# Altium PCB PCB_2020-04-05 13_27_25 MIN.pcbdoc
Units mil, origin at the board's own origin, x right, y up, seen from the top; angles counter-clockwise.
Board outline 12860 x 7442.6 mil, 2 copper layers (Top Layer, Bottom Layer); 150 components, 113 nets, 598 pads, 154 vias.
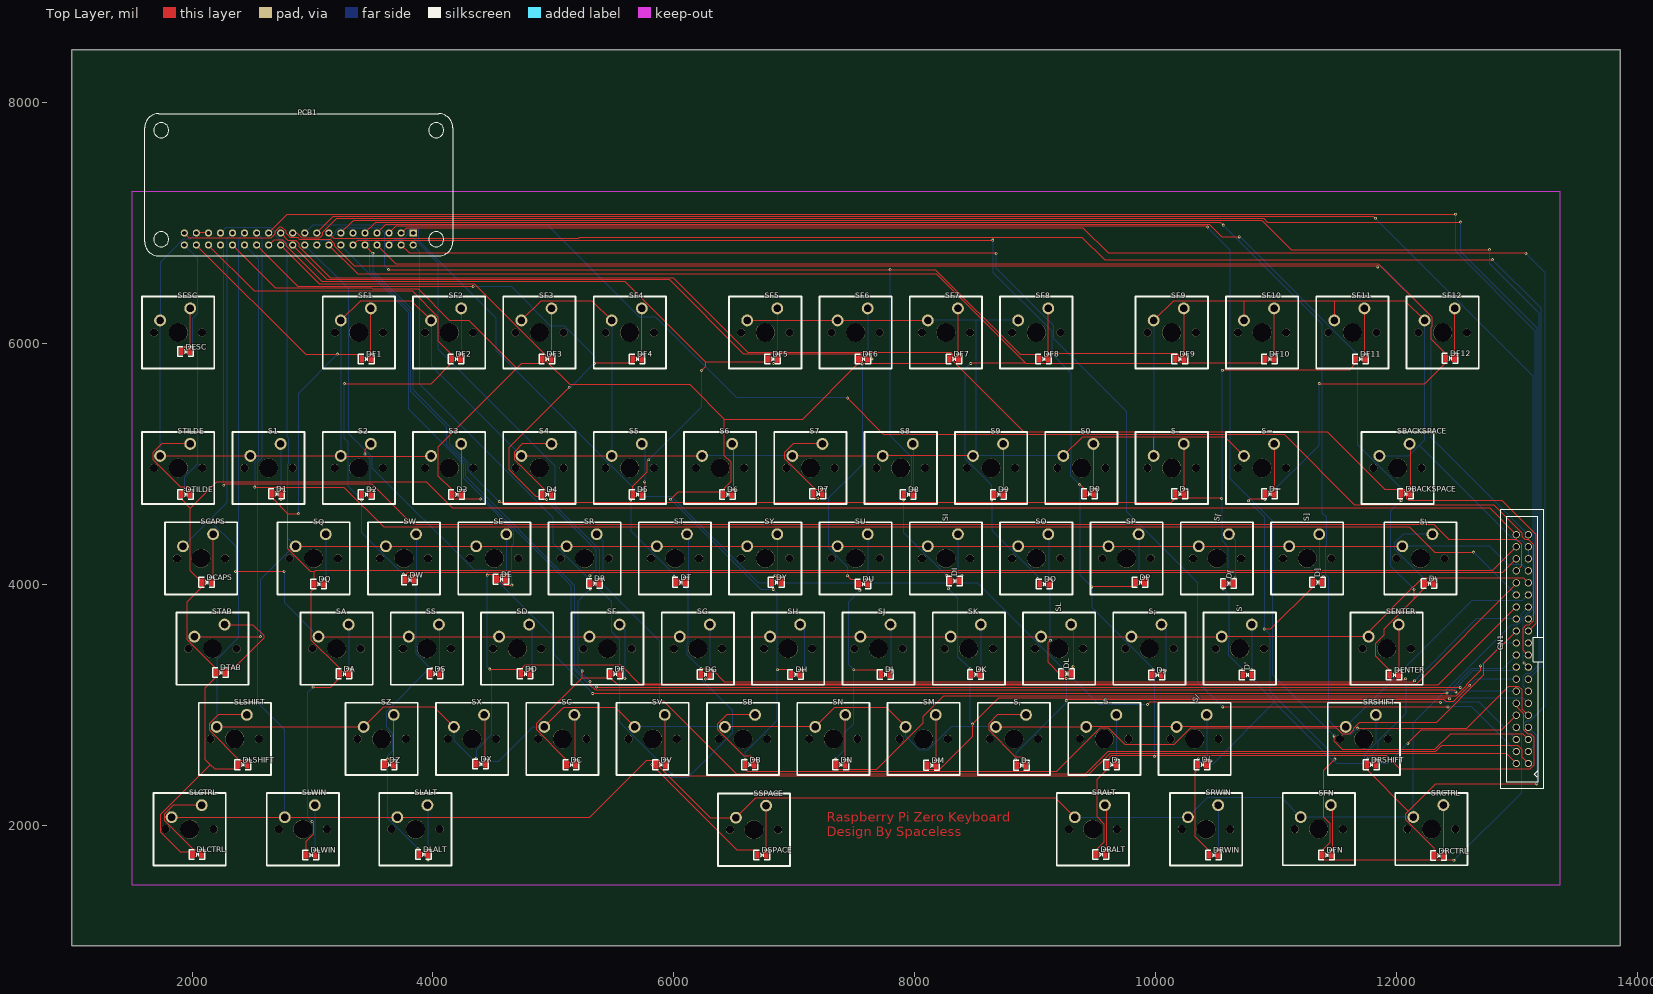
[diagram p0: Top Layer view]
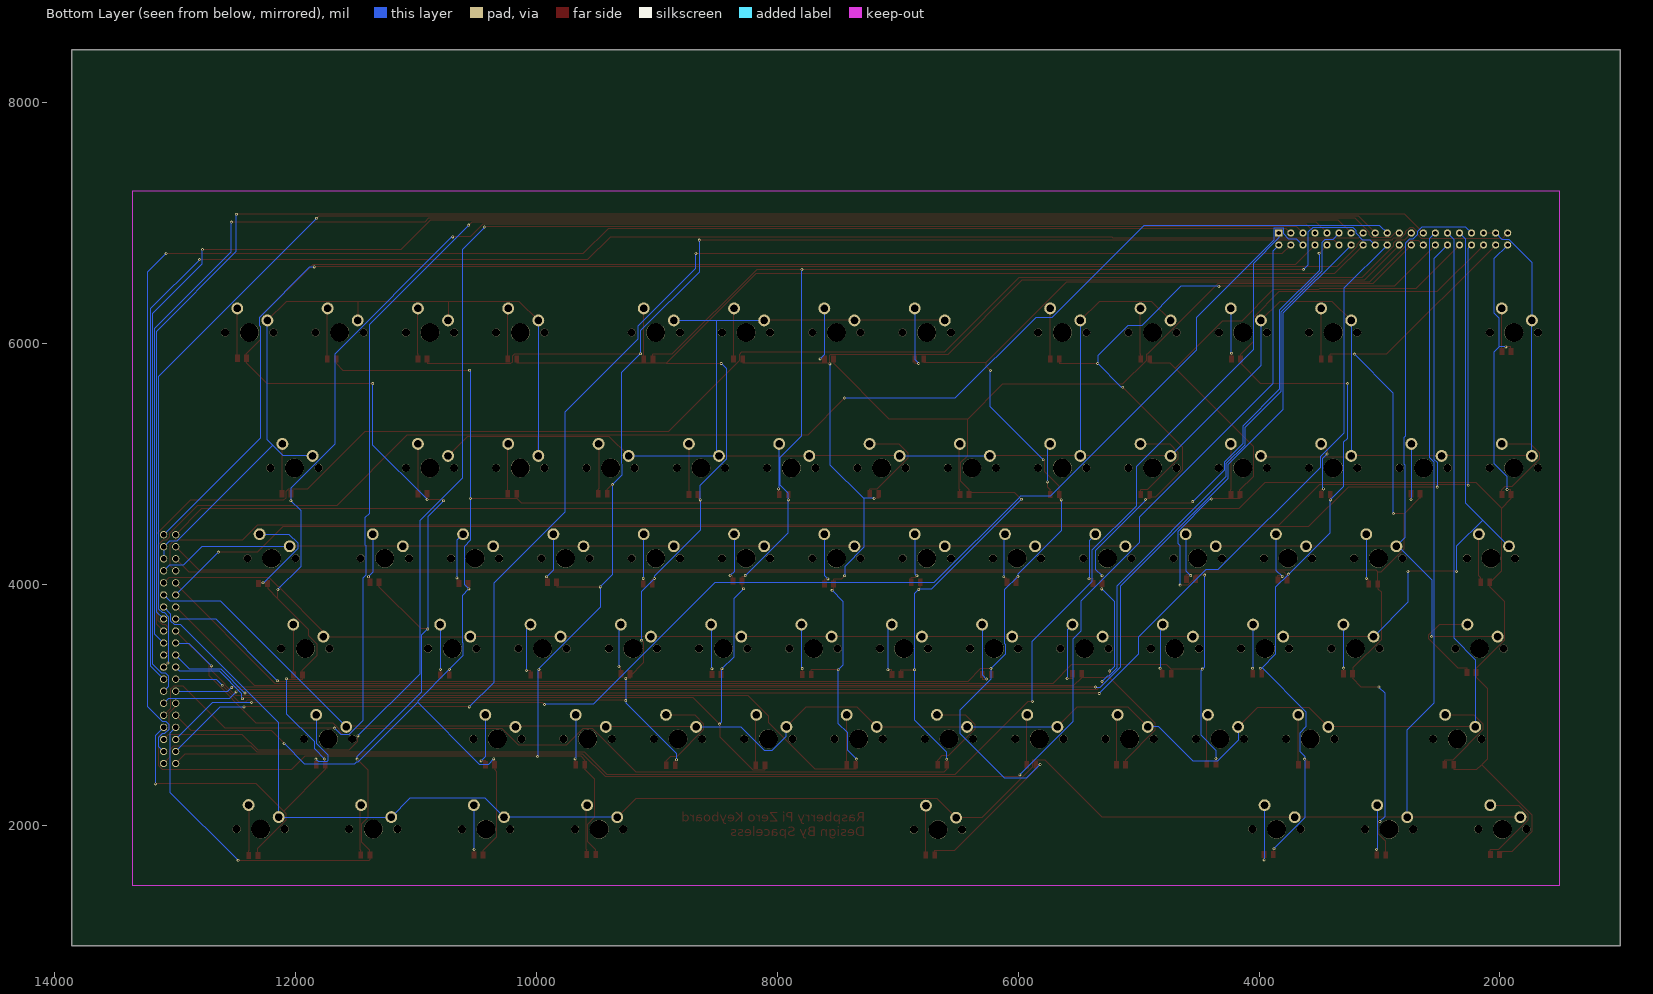
[diagram p1: Bottom Layer view, seen from below]

## Layer stack, top to bottom
Top Layer: signal copper (thickness not stored)
Dielectric: dielectric 12.6, FR-4, Dk 4.8
Bottom Layer: signal copper (thickness not stored)

## Board outline
13860,1000 1000,1000 1000,8442.6 13860,8442.6

## Components (designator, comment, footprint, x,y, rotation, side; value= is the part's Value field where it differs from the comment)
CN1 "RASPBERRYPI" HDR-IDC-2.54-2X20P 13045.9,3465.1 r90 top
D0 "1N4148" 0805D 9450.9,4755.1 r0 top
D1 "1N4148" 0805D 2700.9,4755.1 r0 top
D2 "1N4148" 0805D 3445.9,4750.1 r0 top
D3 "1N4148" 0805D 4195.9,4750.1 r0 top
D4 "1N4148" 0805D 4945.9,4750.1 r0 top
D5 "1N4148" 0805D 5695.9,4750.1 r0 top
D6 "1N4148" 0805D 6445.9,4750.1 r0 top
D7 "1N4148" 0805D 7195.9,4755.1 r0 top
D8 "1N4148" 0805D 7945.9,4750.1 r0 top
D9 "1N4148" 0805D 8695.9,4750.1 r0 top
D' "1N4148" 0805D 10760.9,3250.1 r0 top
D, "1N4148" 0805D 8885.9,2500.1 r0 top
D- "1N4148" 0805D 10200.9,4755.1 r0 top
D. "1N4148" 0805D 9635.9,2505.1 r0 top
D/ "1N4148" 0805D 10385.9,2505.1 r0 top
D; "1N4148" 0805D 10010.9,3250.1 r0 top
D= "1N4148" 0805D 10945.9,4755.1 r0 top
D[ "1N4148" 0805D 10605.9,4010.1 r0 top
D\ "1N4148" 0805D 12270.9,4010.1 r0 top
D] "1N4148" 0805D 11345.9,4020.1 r0 top
DA "1N4148" 0805D 3260.9,3260.1 r0 top
DB "1N4148" 0805D 6630.9,2505.1 r0 top
DBACKSPACE "1N4148" 0805D 12075.9,4755.1 r0 top
DC "1N4148" 0805D 5145.9,2505.1 r0 top
DCAPS "1N4148" 0805D 2120.9,4020.1 r0 top
DD "1N4148" 0805D 4765.9,3260.1 r0 top
DE "1N4148" 0805D 4565.9,4045.1 r0 top
DENTER "1N4148" 0805D 11980.9,3250.1 r0 top
DESC "1N4148" 0805D 1945.9,5935.1 r0 top
DF "1N4148" 0805D 5510.9,3260.1 r0 top
DF1 "1N4148" 0805D 3445.9,5875.1 r0 top
DF2 "1N4148" 0805D 4190.9,5875.1 r0 top
DF3 "1N4148" 0805D 4945.9,5875.1 r0 top
DF4 "1N4148" 0805D 5695.9,5875.1 r0 top
DF5 "1N4148" 0805D 6820.9,5875.1 r0 top
DF6 "1N4148" 0805D 7570.9,5875.1 r0 top
DF7 "1N4148" 0805D 8325.9,5875.1 r0 top
DF8 "1N4148" 0805D 9070.9,5875.1 r0 top
DF9 "1N4148" 0805D 10200.9,5875.1 r0 top
DF10 "1N4148" 0805D 10945.9,5875.1 r0 top
DF11 "1N4148" 0805D 11700.9,5875.1 r0 top
DF12 "1N4148" 0805D 12445.9,5880.1 r0 top
DFN "1N4148" 0805D 11420.9,1755.1 r0 top
DG "1N4148" 0805D 6260.9,3255.1 r0 top
DH "1N4148" 0805D 7010.9,3255.1 r0 top
DI "1N4148" 0805D 8330.9,4030.1 r0 top
DJ "1N4148" 0805D 7755.9,3255.1 r0 top
DK "1N4148" 0805D 8505.9,3255.1 r0 top
DL "1N4148" 0805D 9260.9,3260.1 r0 top
DLALT "1N4148" 0805D 3920.9,1760.1 r0 top
DLCTRL "1N4148" 0805D 2040.9,1760.1 r0 top
DLSHIFT "1N4148" 0805D 2420.9,2505.1 r0 top
DLWIN "1N4148" 0805D 2985.9,1755.1 r0 top
DM "1N4148" 0805D 8140.9,2500.1 r0 top
DN "1N4148" 0805D 7385.9,2505.1 r0 top
DO "1N4148" 0805D 9075.9,4005.1 r0 top
DP "1N4148" 0805D 9870.9,4020.1 r0 top
DQ "1N4148" 0805D 3050.9,4005.1 r0 top
DR "1N4148" 0805D 5340.9,4010.1 r0 top
DRALT "1N4148" 0805D 9545.9,1760.1 r0 top
DRCTRL "1N4148" 0805D 12350.9,1750.1 r0 top
DRSHIFT "1N4148" 0805D 11790.9,2505.1 r0 top
DRWIN "1N4148" 0805D 10480.9,1755.1 r0 top
DS "1N4148" 0805D 4015.9,3260.1 r0 top
DSPACE "1N4148" 0805D 6730.9,1755.1 r0 top
DT "1N4148" 0805D 6055.9,4020.1 r0 top
DTAB "1N4148" 0805D 2235.9,3270.1 r0 top
DTILDE "1N4148" 0805D 1945.9,4750.1 r0 top
DU "1N4148" 0805D 7570.9,4005.1 r0 top
DV "1N4148" 0805D 5890.9,2505.1 r0 top
DW "1N4148" 0805D 3805.9,4040.1 r0 top
DX "1N4148" 0805D 4395.9,2510.1 r0 top
DY "1N4148" 0805D 6850.9,4020.1 r0 top
DZ "1N4148" 0805D 3635.9,2505.1 r0 top
PCB1 "树莓派 zero w BCM编码引脚" "RASPBERRY PI ZERO (FACE UP) OUTLINE" 1605.9,6730.1 r0 top
S0 "MX1A" MX1A 6290.9,9375.1 r0 top
S1 "MX1A" MX1A -459.1,9375.1 r0 top
S2 "MX1A" MX1A 290.9,9375.1 r0 top
S3 "MX1A" MX1A 1040.9,9375.1 r0 top
S4 "MX1A" MX1A 1790.9,9375.1 r0 top
S5 "MX1A" MX1A 2540.9,9375.1 r0 top
S6 "MX1A" MX1A 3290.9,9375.1 r0 top
S7 "MX1A" MX1A 4040.9,9375.1 r0 top
S8 "MX1A" MX1A 4790.9,9375.1 r0 top
S9 "MX1A" MX1A 5540.9,9375.1 r0 top
S' "MX1A" MX1A 7605.9,7875.1 r0 top
S, "MX1A" MX1A 5730.9,7125.1 r0 top
S- "MX1A" MX1A 7040.9,9375.1 r0 top
S. "MX1A" MX1A 6480.9,7125.1 r0 top
S/ "MX1A" MX1A 7230.9,7125.1 r0 top
S; "MX1A" MX1A 6855.9,7875.1 r0 top
S= "MX1A" MX1A 7790.9,9375.1 r0 top
S[ "MX1A" MX1A 7415.9,8625.1 r0 top
S\ "MX1A" MX1A 9105.9,8625.1 r0 top
S] "MX1A" MX1A 8165.9,8625.1 r0 top
SA "MX1A" MX1A 105.9,7875.1 r0 top
SB "MX1A" MX1A 3480.9,7125.1 r0 top
SBACKSPACE "MX1A" MX1A 8915.9,9375.1 r0 top
SC "MX1A" MX1A 1980.9,7125.1 r0 top
SCAPS "MX1A" MX1A -1019.1,8625.1 r0 top
SD "MX1A" MX1A 1605.9,7875.1 r0 top
SE "MX1A" MX1A 1415.9,8625.1 r0 top
SENTER "MX1A" MX1A 8825.9,7875.1 r0 top
SESC "MX1A" MX1A -1209.1,10500.1 r0 top
SF "MX1A" MX1A 2355.9,7875.1 r0 top
SF1 "MX1A" MX1A 290.9,10500.1 r0 top
SF2 "MX1A" MX1A 1040.9,10500.1 r0 top
SF3 "MX1A" MX1A 1790.9,10500.1 r0 top
SF4 "MX1A" MX1A 2540.9,10500.1 r0 top
SF5 "MX1A" MX1A 3665.9,10500.1 r0 top
SF6 "MX1A" MX1A 4415.9,10500.1 r0 top
SF7 "MX1A" MX1A 5165.9,10500.1 r0 top
SF8 "MX1A" MX1A 5915.9,10500.1 r0 top
SF9 "MX1A" MX1A 7040.9,10500.1 r0 top
SF10 "MX1A" MX1A 7790.9,10500.1 r0 top
SF11 "MX1A" MX1A 8540.9,10500.1 r0 top
SF12 "MX1A" MX1A 9290.9,10500.1 r0 top
SFN "MX1A" MX1A_NO3D 11355.9,1970.1 r0 top
SG "MX1A" MX1A 3105.9,7875.1 r0 top
SH "MX1A" MX1A 3855.9,7875.1 r0 top
SI "MX1A" MX1A 5165.9,8625.1 r0 top
SJ "MX1A" MX1A 4605.9,7875.1 r0 top
SK "MX1A" MX1A 5355.9,7875.1 r0 top
SL "MX1A" MX1A 6105.9,7875.1 r0 top
SLALT "MX1A" MX1A 760.9,6375.1 r0 top
SLCTRL "MX1A" MX1A -1114.1,6375.1 r0 top
SLSHIFT "MX1A" MX1A -739.1,7125.1 r0 top
SLWIN "MX1A" MX1A -174.1,6375.1 r0 top
SM "MX1A" MX1A 4980.9,7125.1 r0 top
SN "MX1A" MX1A 4230.9,7125.1 r0 top
SO "MX1A" MX1A 5915.9,8625.1 r0 top
SP "MX1A" MX1A 6665.9,8625.1 r0 top
SQ "MX1A" MX1A -84.1,8625.1 r0 top
SR "MX1A" MX1A 2165.9,8625.1 r0 top
SRALT "MX1A" MX1A 6385.9,6375.1 r0 top
SRCTRL "MX1A" MX1A_NO3D 12290.9,1970.1 r0 top
SRSHIFT "MX1A" MX1A 8635.9,7125.1 r0 top
SRWIN "MX1A" MX1A 7325.9,6375.1 r0 top
SS "MX1A" MX1A 855.9,7875.1 r0 top
SSPACE "MX1A" MX1A_NO3D 6665.9,1965.1 r0 top
ST "MX1A" MX1A 2915.9,8625.1 r0 top
STAB "MX1A" MX1A -924.1,7875.1 r0 top
STILDE "MX1A" MX1A -1209.1,9375.1 r0 top
SU "MX1A" MX1A 4415.9,8625.1 r0 top
SV "MX1A" MX1A 2730.9,7125.1 r0 top
SW "MX1A" MX1A 665.9,8625.1 r0 top
SX "MX1A" MX1A 1230.9,7125.1 r0 top
SY "MX1A" MX1A 3665.9,8625.1 r0 top
SZ "MX1A" MX1A 480.9,7125.1 r0 top

## Footprints (in the part's own frame and the unit in brackets; to place one, negate y for a bottom-side part, rotate by r counter-clockwise, add the part's x,y. Pads: shape width x height; smd on the part's side, far side on the other; paste and mask are expansions set on the pad)
0805D [mil]
  round 0 smd: 1(-37.5,0) 2(37.5,0)
  Top Layer region: -55,27.5 -20,27.5 -20,-27.5 -55,-27.5
  Top Layer region: 20,27.5 55,27.5 55,-27.5 20,-27.5
  silkscreen extent -65,-40 65,40
HDR-IDC-2.54-2X20P [mil]
  round 60 hole 43.3: 1(-950,-50) 2(-950,50) 3(-850,-50) 4(-850,50) 5(-750,-50) 6(-750,50) 7(-650,-50) 8(-650,50) 9(-550,-50) 10(-550,50) 11(-450,-50) 12(-450,50) 13(-350,-50) 14(-350,50) 15(-250,-50) 16(-250,50) 17(-150,-50) 18(-150,50) 19(-50,-50) 20(-50,50) 21(50,-50) 22(50,50) 23(150,-50) 24(150,50) 25(250,-50) 26(250,50) 27(350,-50) 28(350,50) 29(450,-50) 30(450,50) 31(550,-50) 32(550,50) 33(650,-50) 34(650,50) 35(750,-50) 36(750,50) 37(850,-50) 38(850,50) 39(950,-50) 40(950,50)
  silkscreen extent -1161,-177 1160,178
MX1A [mil]
  round 98.4 hole 59.1 slot 59.3 at 0 deg: 1(2943.79,-4306.29) 2(3193.79,-4206.29)
  round 66.9 hole 66.9 unplated: ""(2893.79,-4406.29) ""(3293.79,-4406.29)
  round 156.7 hole 156.7 unplated: ""(3093.79,-4406.29)
  silkscreen extent 2794,-4706 3394,-4106
MX1A_NO3D [mil]
  round 98.4 hole 59.1 slot 59.3 at 0 deg: 1(-150,100) 2(100,200)
  round 66.9 hole 66.9 unplated: ""(-200,0) ""(200,0)
  round 156.7 hole 156.7 unplated: ""(0,0)
  silkscreen extent -300,-300 300,300
"RASPBERRY PI ZERO (FACE UP) OUTLINE" [mil]
  rect 60x60 hole 36: 1(2230,190)
  round 60 hole 36: 2(2230,90) 3(2130,190) 4(2130,90) 5(2030,190) 6(2030,90) 7(1930,190) 8(1930,90) 9(1830,190) 10(1830,90) 11(1730,190) 12(1730,90) 13(1630,190) 14(1630,90) 15(1530,190) 16(1530,90) 17(1430,190) 18(1430,90) 19(1330,190) 20(1330,90) 21(1230,190) 22(1230,90) 23(1130,190) 24(1130,90) 25(1030,190) 26(1030,90) 27(930,190) 28(930,90) 29(830,190) 30(830,90) 31(730,190) 32(730,90) 33(630,190) 34(630,90) 35(530,190) 36(530,90) 37(430,190) 38(430,90) 39(330,190) 40(330,90)
  silkscreen extent 0,0 2559,1181

## Via types
v1: diameter 24, hole 12, Top Layer to Bottom Layer, 154 vias

## Nets (pads, with @x,y where several pads share a name; then routed paths per layer and width w, separated by ;. In a path a pad name is that pad's centre, name@x,y a point inside that pad or via, vN(x,y) a via of type N, cw(c..) or ccw(c..) an arc to the next point about the centre after c; other vN are vias at no path point)
COL1: CN1.40 DCAPS.1 DESC.1 DLCTRL.1 DLSHIFT.1 DTAB.1 DTILDE.1 PCB1.40 | length 17531.4
  Top Layer w10: DESC.1 1908.4,5973.7 v1(1950.5,5973.7) ; v1(1940,4790) 1938.7,4788.7 1908.4,4788.7 DTILDE.1 1908.4,4711.5 1985,4634.9 ; DLCTRL.1 1980.9,1782.6 1901.3,1782.6 1735.1,1948.8 1735.1,2088.3 2151.9,2505.1 ; DCAPS.1 2083.4,4017.9 ; DLSHIFT.1 2383.4,2466.5 2190.5,2466.5 2151.9,2505.1 ; CN1.40 12778.6,4632.4 4164.9,4632.4 3947.8,4849.5 2199.6,4849.5 1985,4634.9 ; 1985,4634.9 1985,4116.3 2083.4,4017.9 ; 2083.4,4017.9 2083.4,4000.8 2083.4,3981.5 1959.1,3857.2 1959.1,3544.1 2194.5,3308.7 2198.4,3308.7 DTAB.1 2198.4,3250.8 2198.4,3231.5 2106,3139.1 2106,2551 2151.9,2505.1
  Bottom Layer w10: PCB1.40 2045.7,6710.3 2045.7,6253 2006.5,6213.8 2006.5,5973.7 ; v1(1940,4790) 1940,4897.6 2046.9,5004.5 2046.9,5933.3 2006.5,5973.7 ; v1(1950.5,5973.7) 2006.5,5973.7
COL2: CN1.38 D1.1 DA.1 DF1.1 DLWIN.1 DQ.1 PCB1.38 | length 16920.7
  Top Layer w10: PCB1.38 2942.3,5913.7 v1(3207,5913.7) 3408.4,5913.7 DF1.1 ; D1.1 2663.4,4716.5 2668.4,4716.5 2794.8,4590.1 ; v1(2884.7,4590.1) 2794.8,4590.1 ; DLWIN.1 2948.4,1867.7 3010.5,1929.8 3010.5,2019.1 v1(2996.3,2033.4) ; v1(3004.6,3150.1) 3152,3150.1 3223.4,3221.5 DA.1 3223.4,3308.1 2987,3544.5 2987,3940.1 3013.4,3966.5 DQ.1 3013.4,4024.4 3013.4,4043.7 3013.4,4106.8 ; CN1.38 12799.4,4118.6 3025.2,4118.6 3013.4,4106.8 ; 2794.8,4590.1 2794.8,4296.7 2984.7,4106.8 3013.4,4106.8
  Bottom Layer w10: v1(2884.7,4590.1) 2884.7,5591.3 v1(3207,5913.7) ; v1(2996.3,2033.4) 2956.7,2072.9 2956.7,3102.3 v1(3004.6,3150.1)
COL3: CN1.36 D2.1 DF2.1 DLALT.1 DS.1 DW.1 DZ.1 PCB1.36 | length 17568.8
  Top Layer w10: PCB1.36 2520.8,6435.2 3832.3,6435.2 4045,6222.5 4045,6022.1 4153.4,5913.7 DF2.1 4153.4,5836.5 3987,5670.1 v1(3265,5670.1) ; v1(3408.4,4704.1) D2.1 ; DZ.1 3598.4,2543.7 3614.5,2543.7 v1(3622.4,2551.6) ; v1(3754.6,4086.9) 3760.2,4086.9 3768.4,4078.7 ; DW.1 3768.4,4078.7 ; v1(3876,1806.7) 3883.4,1799.3 DLALT.1 ; DS.1 3978.4,3298.7 3982.1,3298.7 v1(3989.8,3306.3) ; CN1.36 12883.3,4102.4 3792.2,4102.4 3768.4,4078.7
  Bottom Layer w10: v1(3265,5670.1) 3265,5215 3295,5185 3295,4817.5 v1(3408.4,4704.1) 3408.4,4433.1 v1(3754.6,4086.9) 3860.1,3981.4 3860.1,3424.3 3974.4,3310 ; v1(3876,1806.7) 3876,1810.5 3622.4,2064.1 v1(3622.4,2551.6) 3622.4,2575.5 3664.2,2617.3 3664.2,2766.3 3610.5,2820 3610.5,2946.1 3974.4,3310 ; v1(3989.8,3306.3) 3978.1,3306.3 3974.4,3310
COL4: CN1.32 D3.1 DD.1 DE.1 DF3.1 DX.1 PCB1.32 | length 16440.2
  Top Layer w10: PCB1.32 2694.3,6461.7 3493,6461.7 3503.4,6451.3 3880.4,6451.3 4138.4,6193.3 4302.2,6193.3 4698.1,5797.4 ; DX.1 v1(4358.4,2557) ; v1(4394.7,4711.5) 4158.4,4711.5 D3.1 4158.4,4788.7 4045,4902.1 4045,5144.4 4698.1,5797.4 ; v1(4451,4078.9) 4455.7,4083.7 4528.4,4083.7 4528.4,4064.4 ; v1(4471.9,3298.7) 4728.4,3298.7 ; DE.1 4528.4,4064.4 ; v1(4655.3,3996) 4591.8,3996 4528.4,4059.4 4528.4,4064.4 ; DD.1 4728.4,3298.7 ; DF3.1 4908.4,5836.5 4737.1,5836.5 4698.1,5797.4 ; CN1.32 12995.9,4006.4 12168.7,3179.2 5714.6,3179.2 5558.1,3335.7 4765.4,3335.7 4728.4,3298.7
  Bottom Layer w10: v1(4358.4,2557) 4358.4,2626 4485.4,2753 4485.4,3285.2 v1(4471.9,3298.7) 4451,3319.6 v1(4451,4078.9) ; v1(4394.7,4711.5) 4405.2,4711.5 4672.3,4444.4 4672.3,4340.8 4655.3,4323.7 v1(4655.3,3996)
COL5: CN1.28 D4.1 DC.1 DF4.1 DF.1 DR.1 PCB1.28 | length 16027.8
  Top Layer w10: PCB1.28 2878.2,6477.8 4332,6477.8 v1(4333.3,6476.5) ; D4.1 4908.4,4730.8 ; v1(4944.4,4708.3) 4941.2,4711.5 4908.4,4711.5 4908.4,4730.8 ; DC.1 5108.4,2548.1 4862.1,2794.4 4862.1,2851.1 5239.7,3228.6 ; v1(5131.9,5639.2) 4634.7,5142 4634.7,4953.3 4857.3,4730.8 4908.4,4730.8 ; v1(5239.7,3282.9) 5239.7,3228.6 ; v1(5303.9,4074) 5303.9,4049.1 5303.4,4048.7 DR.1 5303.4,3967.2 v1(5306.1,3964.5) ; v1(5341.4,5836.5) 5658.4,5836.5 DF4.1 ; DF.1 5473.4,3228.6 ; CN1.28 12343.9,3163.1 5539,3163.1 5473.4,3228.6 ; 5239.7,3228.6 5473.4,3228.6
  Bottom Layer w10: v1(4333.3,6476.5) 4649.2,6476.5 4975.4,6150.4 5092.4,6150.4 5341.4,5901.4 v1(5341.4,5836.5) 5144.1,5639.2 v1(5131.9,5639.2) ; v1(4944.4,4708.3) 4944.4,4696.5 5354.8,4286.2 5354.8,4124.9 v1(5303.9,4074) ; v1(5239.7,3282.9) 5203.5,3319.1 5203.5,3861.9 v1(5306.1,3964.5)
COL6: CN1.26 D5.1 DF5.1 DG.1 DSPACE.1 DT.1 DV.1 PCB1.26 | length 17552.9
  Top Layer w10: PCB1.26 2677,6861.2 2753.6,6861.2 2783.3,6831.5 2783.3,6814.6 3082.1,6515.8 5598,6515.8 6266.4,5847.4 ; v1(5642.4,4704.2) 5649.6,4711.5 5658.4,4711.5 5658.4,4734.8 D5.1 5658.4,4817.1 5780.8,4939.5 5780.8,5025.5 v1(5792.2,5036.9) ; v1(5817.6,2506.8) 5851.7,2506.8 DV.1 5853.4,2466.5 6526.2,1793.7 6693.4,1793.7 DSPACE.1 ; v1(6003.2,4066.7) 6011.3,4058.7 6018.4,4058.7 DT.1 ; DG.1 6223.4,3298.3 v1(6227.4,3302.3) 6313.5,3302.3 6420.6,3195.3 12144.9,3195.3 v1(12151.9,3202.3) ; v1(6230.9,5779.2) 6266.4,5814.6 6266.4,5847.4 ; DF5.1 6783.4,5847.4 6266.4,5847.4
  Bottom Layer w10: v1(5642.4,4704.2) 5642.4,4449.2 6003.2,4088.3 v1(6003.2,4066.7) 6113.9,3956 6113.9,3512.2 6108.7,3506.9 6108.7,3421.1 v1(6227.4,3302.3) 6227.4,3213.5 6485.2,2955.7 6485.2,2766.1 6115.9,2396.7 5927.7,2396.7 v1(5817.6,2506.8) ; v1(5792.2,5036.9) 6230.9,5475.7 v1(6230.9,5779.2) ; v1(12151.9,3202.3) 12664.7,3715.1 CN1.26
COL7: CN1.24 D6.1 DB.1 DF6.1 DH.1 DY.1 PCB1.24 | length 16904.6
  Top Layer w10: PCB1.24 3056.4,6499.6 4343,6499.6 4928.9,5913.7 4934.1,5913.7 4937,5910.8 4937,5860.6 5135.3,5662.3 6132.9,5662.3 6420,5375.1 ; v1(5974.3,4709.5) 6034.2,4769.4 6408.4,4769.4 ; D6.1 6408.4,4769.4 ; v1(6593.4,2550.7) DB.1 6593.4,2466.5 6614.5,2445.4 9174.8,2445.4 9537.6,2808.2 9611.8,2808.2 9749.5,2670.5 10149.9,2670.5 10287.6,2808.2 11505,2808.2 11555.1,2758.1 11609.2,2758.1 11641.4,2790.3 11641.4,2805.4 11690.8,2854.8 12331.9,2854.8 12723.3,3246.1 12723.3,3342.5 CN1.24 ; DY.1 6813.4,3974.1 v1(6826.2,3961.3) ; v1(6860,3293.7) 6973.4,3293.7 DH.1 ; DF6.1 7533.4,5836.5 7072,5375.1 6420,5375.1 ; 6408.4,4769.4 6408.4,4788.7 6476.6,4856.9 6476.6,5015.7 6420,5072.3 6420,5375.1
  Bottom Layer w10: v1(5974.3,4709.5) 6722.4,3961.3 v1(6826.2,3961.3) 6860,3927.5 v1(6860,3293.7) 6860,2875.1 6593.4,2608.5 v1(6593.4,2550.7)
COL8: CN1.22 D7.1 DF7.1 DJ.1 DN.1 DU.1 PCB1.22 | length 16260.1
  Top Layer w10: PCB1.22 3124.1,6531.9 5964.9,6531.9 6583,5913.7 7555.7,5913.7 7563.3,5906.1 v1@7563.3,5836.5 ; D7.1 7158.4,4716.5 v1(7197,4716.5) ; v1(7341.5,2550.8) 7348.4,2543.9 DN.1 7348.4,2466.5 7685.4,2466.5 8073.2,2854.3 8073.2,2907.1 8243.2,3077.1 12498.3,3077.1 12585.9,3164.7 12585.9,3174.1 12699.1,3287.3 12699.2,3287.3 v1(12699.2,3325.1) ; v1(7440.9,4073.8) 7470.9,4043.7 7533.4,4043.7 DU.1 7533.4,3966.3 v1(7545.9,3953.8) ; v1(7494.1,3293.7) 7718.4,3293.7 DJ.1 ; v1(7563.3,5833.8) v1@7563.3,5836.5 ; DF7.1 8288.4,5836.5 v1@7563.3,5836.5
  Bottom Layer w10: v1(7197,4716.5) 7282.5,4716.5 ; v1(7341.5,2550.8) 7416.6,2625.9 7416.6,2768.5 7494,2845.9 v1@7494,3293.7 ; v1(7440.9,4073.8) 7440.9,4150.7 7282.5,4309.1 7282.5,4716.5 ; v1(7494.1,3293.7) v1@7494,3293.7 ; v1(7545.9,3953.8) 7451.6,3859.6 7451.6,3336.2 v1@7494,3293.7 ; v1(7563.3,5833.8) 7563.3,4997.3 7282.5,4716.5 ; v1(12699.2,3325.1) 12889.1,3515.1 CN1.22
COL9: CN1.18 D8.1 DF8.1 DI.1 DK.1 DM.1 PCB1.18 | length 16311.5
  Top Layer w10: v1(3631.9,6616.7) v1(7796.2,6616.7) 8172.6,6616.7 8875.6,5913.7 9033.4,5913.7 DF8.1 ; v1(7908.4,4703.9) D8.1 ; DM.1 8103.4,2461.5 8205.8,2461.5 8479.6,2735.3 v1(8479.6,2842.7) 8697.9,3061 12434.1,3061 v1(12442.1,3052.9) ; v1(8266.7,4074.8) 8272.8,4068.7 8293.4,4068.7 DI.1 8293.4,3979.6 v1(8280.2,3966.3) ; v1(8460,3302.1) 8468.4,3293.7 DK.1
  Bottom Layer w10: PCB1.18 3077,6861.2 3137.7,6861.2 3194,6917.5 3194,6939.3 3219.8,6965.1 3554.3,6965.1 3594.8,6924.6 3594.8,6653.8 v1(3631.9,6616.7) ; v1(7796.2,6616.7) 7796.2,5237.5 7974.3,5059.4 7974.3,4826.2 7908.4,4760.3 v1(7908.4,4703.9) 7908.4,4433.1 v1(8266.7,4074.8) ; v1(8280.2,3966.3) 8360,3886.5 8360,3402.1 v1(8460,3302.1) 8460,2862.4 v1(8479.6,2842.7) ; v1(12442.1,3052.9) 12450.2,3061 12450.2,3100 12636.1,3285.9 12966.7,3285.9 CN1.18
COL10: CN1.16 D9.1 D,.1 DF9.1 DL.1 DO.1 PCB1.16 | length 15812.1
  Top Layer w10: PCB1.16 3375.4,6580.6 8178.4,6580.6 8922.5,5836.5 ; v1(8466.1,5836.5) 8922.5,5836.5 ; v1(8639.9,4703.3) 8648.1,4711.5 8658.4,4711.5 D9.1 ; v1(8837.6,2546.2) 8845.1,2538.7 8848.4,2538.7 8848.4,2500.1 ; v1(9021.6,4051) 9029,4043.7 9038.4,4043.7 DO.1 ; v1(9127.3,3538.3) 9110.2,3521.2 9110.2,3354 9223.4,3240.8 ; DL.1 9223.4,3240.8 ; v1(9259,3037.4) 9266.5,3044.9 12396.4,3044.9 12414.8,3026.4 12471,3026.4 v1(12609,3164.5) ; v1(9259,3221.5) 9223.4,3221.5 9223.4,3240.8 ; DF9.1 10163.4,5836.5 8922.5,5836.5
  Bottom Layer w10: v1(8466.1,5836.5) 8421,5791.3 8421,5045.5 8639.9,4826.6 v1(8639.9,4703.3) 8639.9,4451.7 9021.6,4069.9 v1(9021.6,4051) 9127.3,3945.3 v1(9127.3,3538.3) ; v1(8837.6,2546.2) 8837.6,2599.4 9259,3020.8 v1(9259,3037.4) v1(9259,3221.5) ; v1(12609,3164.5) 12659.6,3215.1 CN1.16
COL11: CN1.12 D0.1 D..1 D;.1 DF10.1 DP.1 DRALT.1 PCB1.12 | length 17684.6
  Top Layer w10: PCB1.12 3377.3,6861.5 v1(8648.3,6861.5) ; v1(9137.2,5917.6) 10182.1,5917.6 10198.4,5901.3 10198.4,5850.8 10212.7,5836.5 10908.4,5836.5 DF10.1 ; v1(9369.9,4830.1) 9377,4830.1 9413.4,4793.7 D0.1 ; v1(9470.6,3981.5) 9833.4,3981.5 DP.1 ; DRALT.1 9508.4,1798.7 9575.3,1865.6 9575.3,2012 9515.4,2072 9515.4,2383.5 9598.4,2466.5 D..1 9598.4,2543.7 9633,2578.3 v1@9990.8,2578.3 ; 9973.4,3250.1 9973.4,3289.9 v1(9980.4,3296.9) ; v1(9990.8,2572.4) v1@9990.8,2578.3 ; CN1.12 12995.9,2992.3 13054.8,2933.4 13054.8,2797.7 13090.1,2762.4 13115.7,2762.4 13141.2,2736.8 13141.2,2499.6 13108.4,2466.8 12030.9,2466.8 11919.3,2578.3 v1@9990.8,2578.3
  Bottom Layer w10: v1(8648.3,6861.5) 8648.3,6595.2 9137.2,6106.3 v1(9137.2,5917.6) 9296.6,5758.2 9296.6,5007.2 9291,5001.7 9291,4909 v1(9369.9,4830.1) 9369.9,4082.1 v1(9470.6,3981.5) 9470.6,3810.9 9980.4,3301.2 v1(9980.4,3296.9) 9990.8,3286.5 v1(9990.8,2572.4)
COL12: CN1.10 D'.1 D-.1 D/.1 D[.1 DF11.1 DRWIN.1 PCB1.10 | length 16998.1
  Top Layer w10: PCB1.10 3435.9,6817.3 v1(3501.5,6751.6) ; v1(4550.6,4689.7) 4560.6,4679.7 10126.6,4679.7 10163.4,4716.5 ; D-.1 10163.4,4716.5 ; v1(10354.7,2552.9) 10348.4,2546.7 D/.1 10348.4,2466.5 10330,2448.1 10330,1907.1 10443.4,1793.7 DRWIN.1 ; v1(10548.4,4716.5) 10163.4,4716.5 ; v1(10555.8,5780.8) 11607.7,5780.8 11663.4,5836.5 DF11.1 ; v1(10561.1,3964.2) 10568.4,3971.5 D[.1 ; D'.1 v1(10723.4,3295.9) ; v1(12096.4,2681.5) 12204.2,2789.3 12870.1,2789.3 CN1.10
  Bottom Layer w10: v1(3501.5,6751.6) 3501.5,6606.8 3830.5,6277.8 3830.5,5622.2 4137.3,5315.4 4137.3,5168.6 4288.3,5017.6 4288.3,4952 v1(4550.6,4689.7) ; v1(10354.7,2552.9) 10398.2,2509.3 10473.3,2509.3 10986.4,3022.5 ; v1(10555.8,5780.8) 10548.4,5773.3 v1(10548.4,4716.5) 10548.4,4368.2 10601.6,4315 10601.6,4004.7 v1(10561.1,3964.2) 10612.6,3912.7 10612.6,3518.7 10607,3513.1 10607,3412.3 v1(10723.4,3295.9) 10986.4,3032.9 10986.4,3022.5 ; v1(12096.4,2681.5) 11927.1,2512.1 11507.2,2512.1 11490.7,2528.6 11480.3,2528.6 10986.4,3022.5
COL13: CN1.8 D=.1 D].1 DF12.1 DFN.1 PCB1.8 | length 18305.6
  Top Layer w10: PCB1.8 3694.8,6661.2 11855.8,6661.2 12298.3,6218.6 12298.3,6144.4 12291.2,6137.3 12291.2,6035.8 12408.4,5918.7 DF12.1 12408.4,5841.5 12237,5670.1 v1(11359.4,5670.1) ; v1(10771,4696.5) 10782.6,4708.1 v1(10908.4,4708.1) D=.1 ; v1(10903,3632) 10958.9,3632 11308.4,3981.5 D].1 ; v1(11489.8,2551.7) 11395,2456.9 11395,2069.8 11450.3,2014.5 11450.3,1860.6 11383.4,1793.7 DFN.1 11383.4,1745.4 11383.4,1716.5 11388.4,1711.5 v1(12477.9,1711.5)
  Bottom Layer w10: v1(10771,4696.5) 10903,4564.5 v1(10903,3632) 10953,3582 10953,3111.5 11489.8,2574.6 v1(11489.8,2551.7) ; v1(10908.4,4708.1) 11359.4,5159.1 v1(11359.4,5670.1) ; v1(12477.9,1711.5) 13039.7,2273.3 13039.7,2771.3 CN1.8
COL14: CN1.7 D\.1 DBACKSPACE.1 DENTER.1 DRCTRL.1 DRSHIFT.1 PCB1.7 | length 15632.4
  Top Layer w10: PCB1.7 3609.3,6993.5 10445.4,6993.5 10551.1,6887.8 v1(10695.8,6887.8) ; v1(11759.1,2552.2) 11753.4,2546.5 DRSHIFT.1 11753.4,2466.5 12100.7,2119.2 ; DBACKSPACE.1 12038.4,4697.4 v1(12039,4696.8) ; v1(12076.3,3218.4) 12069.4,3211.5 11943.4,3211.5 DENTER.1 11943.4,3269.4 11943.4,3288.7 11823.6,3408.5 11823.6,3509.7 11893.4,3579.5 11893.4,3631.5 12146.9,3885 ; v1(12146.9,3960.1) 12146.9,3885 ; D\.1 12233.4,3971.5 12146.9,3885 ; DRCTRL.1 12313.4,1812.3 12078.5,2047.2 12078.5,2097 12100.7,2119.2 ; v1(13164.4,2345.8) 12327.4,2345.8 12100.7,2119.2
  Bottom Layer w10: v1(10695.8,6887.8) 10703.7,6887.8 11676.5,5915 11676.5,5165 12039,4802.6 v1(12039,4696.8) 11954.6,4612.4 11954.6,4152.4 v1(12146.9,3960.1) ; v1(11759.1,2552.2) 11846.5,2639.6 11846.5,2699.4 12076.3,2929.2 v1(12076.3,3218.4) ; CN1.7 13164.4,2746.6 v1(13164.4,2345.8)
D0_2: D0.2 S0.2 | length 415.2
  Top Layer w10: S0.2 9484.7,4797.4 9488.4,4793.7 D0.2
D1_2: D1.2 S1.2 | length 509.4
  Top Layer w10: v1(2738.4,4708) D1.2
  Bottom Layer w10: S1.2 2734.7,4711.7 v1(2738.4,4708)
D2_2: D2.2 S2.2 | length 472.7
  Top Layer w10: v1(3435.5,5085.1) 3435.5,5119.6 S2.2 ; v1(3465.2,4795.8) 3472.4,4788.7 3483.4,4788.7 D2.2
  Bottom Layer w10: v1(3435.5,5085.1) 3474.1,5046.5 3474.1,4804.8 v1(3465.2,4795.8)
D3_2: D3.2 S3.2 | length 419.2
  Top Layer w10: D3.2 4233.4,4788.7 4234.7,4790 S3.2
D4_2: D4.2 S4.2 | length 849.9
  Top Layer w10: D4.2 4983.4,4788.7 4927.8,4788.7 4674.2,5042.3 4674.2,5100.6 4742.4,5168.8 S4.2
D5_2: D5.2 S5.2 | length 437.8
  Top Layer w10: D5.2 5733.4,4788.7 5757.1,4812.4 v1(5757.1,4853.1)
  Bottom Layer w10: S5.2 5757.1,5146.4 v1(5757.1,4853.1)
D6_2: D6.2 S6.2 | length 425.9
  Top Layer w10: D6.2 6483.4,4788.7 6492.7,4798 6492.7,5160.8 S6.2
D7_2: D7.2 S7.2 | length 853.2
  Top Layer w10: D7.2 7233.4,4793.7 7172.8,4793.7 6918.6,5047.9 6918.6,5096.2 6991.2,5168.8 S7.2
D8_2: D8.2 S8.2 | length 424
  Top Layer w10: D8.2 7983.4,4788.7 v1(7990.4,4795.7)
  Bottom Layer w10: S8.2 7990.4,5163.1 v1(7990.4,4795.7)
D9_2: D9.2 S9.2 | length 419.2
  Top Layer w10: D9.2 8733.4,4788.7 8734.7,4790 S9.2
D'_2: D'.2 S'.2 | length 419.2
  Top Layer w10: D'.2 v1(10798.4,3296.4)
  Bottom Layer w10: v1(10798.4,3296.4) 10799.7,3297.7 S'.2
D,_2: D,.2 S,.2 | length 846
  Top Layer w10: 8923.4,2500.1 8923.4,2538.7 8890.5,2571.6 8836.6,2571.6 8614.1,2794.1 8614.1,2845.4 8687.5,2918.8 8924.7,2918.8
D-_2: D-.2 S-.2 | length 415.2
  Top Layer w10: S-.2 10238.4,5165.1 D-.2
D._2: D..2 S..2 | length 418.4
  Top Layer w10: D..2 9673.4,2543.7 9679.8,2550.1 v1(9679.8,2552.9)
  Bottom Layer w10: S..2 9674.7,2558.1 v1(9679.8,2552.9)
D/_2: D/.2 S/.2 | length 475.2
  Top Layer w10: D/.2 10423.4,2543.7 10452.7,2543.7 v1(10460,2536.4)
  Bottom Layer w10: S/.2 10424.7,2571.7 v1(10460,2536.4)
D;_2: D;.2 S;.2 | length 468.1
  Top Layer w10: 10048.4,3250.1 10048.4,3288.7 v1(10083.7,3288.7)
  Bottom Layer w10: 10049.7,3668.8 10083.7,3634.8 v1(10083.7,3288.7)
D=_2: D=.2 S=.2 | length 414.2
  Top Layer w10: D=.2 10983.4,4793.7 10984.7,4795 S=.2
D[_2: D[.2 S[.2 | length 442.8
  Top Layer w10: D[.2 10643.4,4048.7 10653.1,4048.7 v1(10660.9,4056.5)
  Bottom Layer w10: S[.2 10660.9,4367.6 v1(10660.9,4056.5)
D\_2: D\.2 S\.2 | length 838.3
  Top Layer w10: v1(12270.9,4016.3) 12302.2,4016.3 D\.2
  Bottom Layer w10: v1(12270.9,4016.3) 12265.2,4016.3 11984.5,4297 11984.5,4348.1 12055.2,4418.8 S\.2
D]_2: D].2 S].2 | length 421
  Top Layer w10: D].2 11383.4,4058.7 11388.1,4058.7 v1(11395.2,4065.7)
  Bottom Layer w10: S].2 11359.7,4101.3 v1(11395.2,4065.7)
DA_2: DA.2 SA.2 | length 409.2
  Top Layer w10: DA.2 v1(3298.4,3306.6)
  Bottom Layer w10: v1(3298.4,3306.6) 3299.7,3307.9 SA.2
DB_2: DB.2 SB.2 | length 841.4
  Top Layer w10: DB.2 6668.4,2543.7 6633.6,2578.5 6579.8,2578.5 6360.4,2797.8 6360.4,2840.7 6438.5,2918.8 SB.2
DBACKSPACE_2: DBACKSPACE.2 SBACKSPACE.2 | length 415.2
  Top Layer w10: SBACKSPACE.2 12113.4,5165.1 DBACKSPACE.2
DC_2: DC.2 SC.2 | length 417.3
  Top Layer w10: SC.2 5183.4,2910.1 DC.2
DCAPS_2: DCAPS.2 SCAPS.2 | length 405.5
  Top Layer w10: DCAPS.2 2158.4,4058.7 2174.7,4075 SCAPS.2
DD_2: DD.2 SD.2 | length 431.9
  Top Layer w10: DD.2 4803.4,3298.7 4814.3,3298.7 v1(4821.9,3306.3)
  Bottom Layer w10: SD.2 4821.9,3646.6 v1(4821.9,3306.3)
DE_2: DE.2 SE.2 | length 440.1
  Top Layer w10: v1(4567.2,4074.8) 4576.1,4083.7 4603.4,4083.7 DE.2
  Bottom Layer w10: v1(4567.2,4074.8) 4609.7,4117.3 SE.2
DENTER_2: DENTER.2 SENTER.2 | length 419.2
  Top Layer w10: DENTER.2 12018.4,3288.7 12019.7,3290 SENTER.2
DF_2: DF.2 SF.2 | length 549.6
  Top Layer w10: DF.2 5548.4,3221.5 v1(5593.8,3221.5)
  Bottom Layer w10: SF.2 5593.8,3624.7 v1(5593.8,3221.5)
DFN_2: DFN.2 SFN.2 | length 422.8
  Top Layer w10: SFN.2 11466.5,2159.5 11466.5,1801.7 11458.4,1793.7 DFN.2
DG_2: DG.2 SG.2 | length 538.8
  Top Layer w10: v1(6264.9,3216.5) 6298.4,3216.5 DG.2
  Bottom Layer w10: v1(6264.9,3216.5) 6299.7,3251.3 SG.2
DH_2: DH.2 SH.2 | length 461.4
  Top Layer w10: DH.2 7048.4,3293.7 v1(7082.5,3293.7)
  Bottom Layer w10: SH.2 7082.5,3636 v1(7082.5,3293.7)
DI_2: DI.2 SI.2 | length 421.3
  Top Layer w10: DI.2 8368.4,4068.7 8384.3,4068.7 v1(8392.1,4076.4)
  Bottom Layer w10: SI.2 8359.7,4108.8 v1(8392.1,4076.4)
DJ_2: DJ.2 SJ.2 | length 416.3
  Top Layer w10: DJ.2 v1(7793.4,3302.2)
  Bottom Layer w10: v1(7793.4,3302.2) 7799.7,3308.5 SJ.2
DK_2: DK.2 SK.2 | length 416.3
  Top Layer w10: DK.2 v1(8543.4,3302.1)
  Bottom Layer w10: v1(8543.4,3302.1) 8549.7,3308.4 SK.2
DL_2: DL.2 SL.2 | length 422.2
  Top Layer w10: DL.2 9298.4,3305 v1(9315.3,3321.9)
  Bottom Layer w10: SL.2 9315.3,3653.2 v1(9315.3,3321.9)
DLALT_2: DLALT.2 SLALT.2 | length 501.4
  Top Layer w10: v1(3958.4,1714.5) DLALT.2
  Bottom Layer w10: SLALT.2 3958.4,2165.1 v1(3958.4,1714.5)
DLCTRL_2: DLCTRL.2 SLCTRL.2 | length 844.1
  Top Layer w10: DLCTRL.2 2078.4,1798.7 2012.8,1798.7 1767.7,2043.8 1767.7,2094.2 1842.3,2168.8 SLCTRL.2
DLSHIFT_2: DLSHIFT.2 SLSHIFT.2 | length 853.2
  Top Layer w10: SLSHIFT.2 2215.5,2918.8 2141.6,2844.9 2141.6,2794.9 2392.8,2543.7 2458.4,2543.7 DLSHIFT.2
DLWIN_2: DLWIN.2 SLWIN.2 | length 415.2
  Top Layer w10: DLWIN.2 v1(3023.4,1801.9)
  Bottom Layer w10: SLWIN.2 3019.7,1805.6 v1(3023.4,1801.9)
DM_2: DM.2 SM.2 | length 420.2
  Top Layer w10: SM.2 8178.4,2915.1 DM.2
DN_2: DN.2 SN.2 | length 414.2
  Top Layer w10: DN.2 7423.4,2543.7 7424.7,2545 SN.2
DO_2: DO.2 SO.2 | length 415.2
  Top Layer w10: DO.2 v1(9113.4,4052.1)
  Bottom Layer w10: SO.2 9113.4,4415.1 v1(9113.4,4052.1)
DP_2: DP.2 SP.2 | length 424.7
  Top Layer w10: DP.2 9908.4,4058.7 v1(9915.4,4065.7)
  Bottom Layer w10: SP.2 9859.7,4121.4 v1(9915.4,4065.7)
DQ_2: DQ.2 SQ.2 | length 429.7
  Top Layer w10: DQ.2 3088.4,4043.7 3100.7,4043.7 v1(3108.6,4051.6)
  Bottom Layer w10: v1(3108.6,4051.6) 3109.7,4052.7 SQ.2
DR_2: DR.2 SR.2 | length 464
  Top Layer w10: DR.2 5378.4,4048.7 v1(5412,4048.7)
  Bottom Layer w10: SR.2 5412,4366.5 v1(5412,4048.7)
DRALT_2: DRALT.2 SRALT.2 | length 417
  Top Layer w10: SRALT.2 9591.5,2157 9591.5,1806.7 9583.4,1798.7 DRALT.2
DRCTRL_2: DRCTRL.2 SRCTRL.2 | length 421
  Top Layer w10: DRCTRL.2 12388.4,1788.7 12390.9,1791.2 SRCTRL.2
DRSHIFT_2: DRSHIFT.2 SRSHIFT.2 | length 578.4
  Top Layer w10: DRSHIFT.2 11828.4,2543.7 11831.6,2546.8 v1(11831.6,2551.6)
  Bottom Layer w10: SRSHIFT.2 11829.7,2682.7 11734,2586.9 11734,2538.7 11743.6,2529.1 11809,2529.1 v1(11831.6,2551.6)
DRWIN_2: DRWIN.2 SRWIN.2 | length 414.2
  Top Layer w10: DRWIN.2 v1(10518.4,1801.2)
  Bottom Layer w10: v1(10518.4,1801.2) 10519.7,1802.5 SRWIN.2
DS_2: DS.2 SS.2 | length 410.2
  Top Layer w10: DS.2 v1(4053.4,3306.1)
  Bottom Layer w10: SS.2 4053.4,3665.1 v1(4053.4,3306.1)
DSPACE_2: DSPACE.2 SSPACE.2 | length 411
  Top Layer w10: SSPACE.2 6768.4,2162.6 DSPACE.2
DT_2: DT.2 ST.2 | length 425.1
  Top Layer w10: DT.2 6093.4,4058.7 6112.7,4058.7 v1(6119.7,4065.6)
  Bottom Layer w10: ST.2 6119.7,4408.8 v1(6119.7,4065.6)
DTAB_2: DTAB.2 STAB.2 | length 847.2
  Top Layer w10: STAB.2 2503.7,3668.8 2594,3578.5 2594,3553.7 2348.9,3308.7 2273.4,3308.7 DTAB.2
DTILDE_2: DTILDE.2 STILDE.2 | length 846.7
  Top Layer w10: DTILDE.2 1983.4,4788.7 1958.5,4813.6 1902.9,4813.6 1674.2,5042.3 1674.2,5095.2 1747.8,5168.8 STILDE.2
DU_2: DU.2 SU.2 | length 451.2
  Top Layer w10: v1(7580.4,4048.2) 7585,4043.7 7608.4,4043.7 DU.2
  Bottom Layer w10: v1(7580.4,4048.2) 7609.7,4077.5 SU.2
DV_2: DV.2 SV.2 | length 415.2
  Top Layer w10: SV.2 5928.4,2915.1 DV.2
DW_2: DW.2 SW.2 | length 449.7
  Top Layer w10: v1(3807.8,4068.9) 3817.5,4078.7 3843.4,4078.7 DW.2
  Bottom Layer w10: v1(3807.8,4068.9) 3859.7,4120.9 SW.2
DX_2: DX.2 SX.2 | length 412.3
  Top Layer w10: SX.2 4433.4,2910.1 DX.2
DY_2: DY.2 SY.2 | length 444.5
  Top Layer w10: v1(6841.4,4073.8) 6856.4,4058.7 6888.4,4058.7 DY.2
  Bottom Layer w10: v1(6841.4,4073.8) 6859.7,4092.1 SY.2
DZ_2: DZ.2 SZ.2 | length 414.2
  Top Layer w10: DZ.2 3673.4,2543.7 3674.7,2545 SZ.2
PCB1_1: CN1.1 PCB1.1 | length 12398.4
  Top Layer w10: v1(5882.2,3030.1) 5917.9,3030.1 6524.2,2423.8 9416.3,2423.8 9604.2,2611.7 12322.6,2611.7 12372.5,2661.6 13012.1,2661.6 13045.9,2627.8 13045.9,2565.1 CN1.1
  Bottom Layer w10: PCB1.1 3835.9,6879 4045,6669.9 4045,5955.1 5015.1,4985.1 5015.1,4656.4 5383.4,4288.1 5383.4,4027.8 5882.2,3529 v1(5882.2,3030.1)
PCB1_2: CN1.2 PCB1.2 | length 12416.5
  Top Layer w10: v1(5985.9,2420.6) 5998.8,2407.7 9431,2407.7 9619,2595.6 12915.4,2595.6 CN1.2
  Bottom Layer w10: PCB1.2 3886.9,6769.1 3886.9,5669.2 4994.9,4561.2 4994.9,4348.3 5479.1,3864.1 5479.1,3612.7 5545.7,3546.1 5545.7,2860.8 v1(5985.9,2420.6)
PCB1_3: CN1.3 PCB1.3 | length 13798.4
  Top Layer w10: PCB1.3 3777,6961.2 9398.8,6961.2 9609.9,6750.1 v1(13076.2,6750.1)
  Bottom Layer w10: v1(13076.2,6750.1) 13233.7,6592.6 13233.7,2991.5 13107.3,2865.1 13080.1,2865.1 13054.8,2839.8 13054.8,2796.7 13090.8,2760.7 13108.5,2760.7 13139.3,2729.8 13139.3,2658.5 CN1.3
PCB1_4: CN1.4 PCB1.4 | length 12105.4
  Top Layer w10: PCB1.4 3805.9,6750.1 v1(8676.6,6750.1) ; v1(10558.3,2984.4) v1(12428.9,2984.4)
  Bottom Layer w10: v1(8676.6,6750.1) 8676.6,6627.1 9153.3,6150.4 9153.3,6041.5 9759.9,5434.9 9759.9,4607 10351,4015.9 10351,3191.6 v1(10558.3,2984.4) ; v1(12428.9,2984.4) 12626.6,2984.4 CN1.4
PCB1_5: CN1.5 PCB1.5 | length 13243.1
  Top Layer w10: PCB1.5 3693.2,6977.4 10422.7,6977.4 v1(10430.3,6969.8) ; v1(11482.4,2744.7) 11482.4,2699.3 11553.8,2627.8 12315.9,2627.8 12446.9,2758.8 13052.2,2758.8 CN1.5
  Bottom Layer w10: v1(10430.3,6969.8) 10618.4,6781.7 10618.4,4881.8 10969.1,4531.1 10969.1,3258.1 v1(11482.4,2744.7)
PCB1_6: CN1.6 PCB1.6 | length 11434.8
  Top Layer w10: v1(9933.6,3005) 9950.4,3021.8 v1(12365.6,3021.8)
  Bottom Layer w10: PCB1.6 3685.9,6870.1 3752,6870.1 3794.8,6912.9 3794.8,6958.3 3797.7,6961.2 3875.9,6961.2 3878.8,6958.3 3878.8,6858.9 4519.9,6217.8 4519.9,5948.3 5735.7,4732.5 5983.9,4732.5 5997.4,4719 5997.4,4717.4 6700.2,4014.6 8518.6,4014.6 9528.3,3005 v1(9933.6,3005) ; v1(12365.6,3021.8) 12689.2,3021.8 CN1.6
PCB1_9: CN1.9 PCB1.9 | length 13718
  Top Layer w10: PCB1.9 3525.5,7009.6 10538.6,7009.6 v1(10562.8,6985.5) ; v1(11676.9,2808.3) 12586.3,2808.3 12934.3,3156.2 13013.5,3156.2 13040.2,3129.5 13040.2,2970.8 CN1.9
  Bottom Layer w10: v1(10562.8,6985.5) 11386.3,6162 11386.3,4592.9 11420.4,4558.8 11420.4,4326.4 11415.1,4321.2 11415.1,4080.8 11436.5,4059.4 11436.5,2875 11555.5,2756 11624.6,2756 v1(11676.9,2808.3)
PCB1_11: CN1.11 PCB1.11 | length 12466.3
  Top Layer w10: v1(5304.2,3196) 5304.2,3169.1 5347.8,3125.5 12478.5,3125.5 v1(12494.6,3109.4)
  Bottom Layer w10: PCB1.11 3385.9,6870.1 3451.7,6870.1 3477,6844.8 3477,6605.2 3814.4,6267.8 3814.4,5607.4 4115.5,5306.3 4115.5,5163.5 4272.2,5006.8 4272.2,4899 5179.1,3992.1 5179.1,3310.8 5245.2,3244.8 5255.4,3244.8 v1(5304.2,3196) ; v1(12494.6,3109.4) 12546.6,3057.4 13053.6,3057.4 CN1.11
PCB1_13: CN1.13 PCB1.13 | length 13609.4
  Top Layer w10: PCB1.13 3341.6,7025.8 10882.4,7025.8 11125.6,6782.6 v1(12773.4,6782.6)
  Bottom Layer w10: v1(12773.4,6782.6) 12773.4,6664.9 13185.3,6253 13185.3,3339.2 13111.2,3265.1 13080.1,3265.1 13054.8,3239.8 13054.8,3156.2 CN1.13
PCB1_14: CN1.14 PCB1.14 | length 12225.4
  Top Layer w10: v1(5358.4,3150) 5361.4,3147 v1(12530.4,3147)
  Bottom Layer w10: PCB1.14 3798.3,6257.7 3798.3,5457.9 4256.1,5000.1 4256.1,4883.4 5148,3991.5 5148,3319.1 5317.2,3150 v1(5358.4,3150) ; v1(12530.4,3147) 12562.3,3115.1 CN1.14
PCB1_15: CN1.15 PCB1.15 | length 13455.2
  Top Layer w10: PCB1.15 3178.4,6877.6 5210.3,6877.6 5219.1,6886.4 9388.8,6886.4 9576.7,6698.5 v1(12797.7,6698.5)
  Bottom Layer w10: v1(12797.7,6698.5) 13201.4,6294.7 13201.4,3320.6 CN1.15
PCB1_17: CN1.17 PCB1.17 | length 13187
  Top Layer w10: PCB1.17 3173.8,7058 11810,7058 v1(11825.5,7042.5) ; v1(13061.3,3349.7) CN1.17
  Bottom Layer w10: v1(11825.5,7042.5) 13137,5731 13137,3796.8 13105.3,3765.1 13087,3765.1 13053.1,3731.2 13053.1,3357.9 v1(13061.3,3349.7)
PCB1_19: CN1.19 PCB1.19 | length 12330.8
  Top Layer w10: v1(7440.9,5550.1) 7745.2,5245.7 11071.7,5245.7 11656.4,4661.1 12812.6,4661.1 13045.9,4427.7 13045.9,4399.3 13071.2,4374 13099,4374 13140.1,4332.9 13140.1,3699.8 13105.3,3665.1 13080.1,3665.1 13054.8,3639.8 13054.8,3456.2 CN1.19
  Bottom Layer w10: PCB1.19 3000.2,6984.4 4953.7,6984.4 5716.1,6221.9 5849.7,6221.9 6521.5,5550.1 v1(7440.9,5550.1)
PCB1_20: CN1.20 PCB1.20 | length 12573.4
  Top Layer w10: v1(5327.1,3096.4) 12416.9,3096.4 v1(12420.7,3100.2)
  Bottom Layer w10: PCB1.20 3295.3,6460.7 3295.3,5258 3492.8,5060.5 3492.8,4972.7 4343.3,4122.2 4443.1,4122.2 5001.7,3563.7 5001.7,3421.9 v1(5327.1,3096.4) ; v1(12420.7,3100.2) 12622.5,3302 12882.8,3302 CN1.20
PCB1_21: CN1.21 PCB1.21 | length 13598.7
  Top Layer w10: PCB1.21 2869.8,6920.1 2910.9,6879 3061.3,6879 3085.9,6903.6 3085.9,6928.2 3199.5,7041.9 10897.1,7041.9 10928.7,7010.3 v1(12533.9,7010.3)
  Bottom Layer w10: v1(12533.9,7010.3) 12533.9,6762.5 13169.2,6127.2 13169.2,3588.4 CN1.21
PCB1_23: CN1.23 PCB1.23 | length 12361.1
  Top Layer w10: PCB1.23 2794.8,6861.2 2860.6,6861.2 2885.9,6835.9 2885.9,6808.9 3146.8,6548 5994.3,6548 6612.5,5929.8 8298,5929.8 8317,5910.8 8317,5859.9 8906,5271 11427.5,5271 11904.8,4793.7 12060.5,4793.7 12083.7,4770.5 12083.7,4719.4 12104,4699.2 12876.8,4699.2 13156.2,4419.8 13156.2,3675.4 CN1.23
PCB1_25: CN1.25 PCB1.25 | length 13578.2
  Top Layer w10: PCB1.25 2791.3,7075.5 v1(12491.7,7075.5)
  Bottom Layer w10: v1(12491.7,7075.5) 12491.7,6767.5 13153.1,6106.1 13153.1,3772.3 CN1.25
PCB1_30: CN1.30 PCB1.30 | length 12913.7
  Top Layer w10: v1(2520.9,4809.9) 3260.9,4809.9 3591.7,4479.1 12107.2,4479.1 12316.7,4269.6 v1(12641.4,4269.6)
  Bottom Layer w10: PCB1.30 2548.2,6707.8 2548.2,5042.1 2520.9,5014.8 v1(2520.9,4809.9) ; v1(12641.4,4269.6) CN1.30
PCB1_34: CN1.34 PCB1.34 | length 13229.6
  Top Layer w10: v1(2263.5,4825.5) 2271.4,4833.4 3497,4833.4 3831.4,4499 12314.3,4499 12439.8,4373.5 13001.4,4373.5 13039.1,4335.8 13039.1,4158.3 CN1.34
  Bottom Layer w10: PCB1.34 2263.5,6792.5 v1(2263.5,4825.5)
PCB1_39: CN1.39 PCB1.39 | length 12904.5
  Top Layer w10: PCB1.39 1978.6,6877.4 2655.2,6877.4 2688.5,6910.6 2688.5,6931.9 2724.3,6967.7 2746.4,6967.7 2780.2,6933.9 2780.2,6917 2818.2,6879 2880.1,6879 2896.2,6862.9 3151.4,6862.9 3185.9,6828.3 3185.9,6808 3349.9,6644 11839.9,6644 v1(11845.9,6638.1)
  Bottom Layer w10: v1(11845.9,6638.1) 11881.2,6638.1 12298.3,6220.9 12298.3,6150.3 12289.5,6141.4 12289.5,5221.5 CN1.39
ROW1: CN1.35 CN1.37 PCB1.35 PCB1.37 S0.1 S1.1 S2.1 S3.1 S4.1 S5.1 S6.1 S7.1 S8.1 S9.1 S-.1 S=.1 SBACKSPACE.1 SESC.1 SF1.1 SF2.1 SF3.1 SF4.1 SF5.1 SF6.1 SF7.1 SF8.1 SF9.1 SF10.1 SF11.1 SF12.1 STILDE.1 | length 26091.3
  Top Layer w10: STILDE.1 S1.1 S2.1 3241.5,5062 3977.9,5062 S3.1 ; PCB1.37 PCB1.35 ; SF1.1 3395,6354.1 3824.4,6354.1 SF2.1 ; S4.1 S5.1 S6.1 ; SF3.1 4895,6354.1 5324.4,6354.1 SF4.1 ; SF5.1 SF6.1 SF7.1 ; S7.1 S8.1 S9.1 ; S0.1 9395.5,5229.6 9984.7,5229.6 ; S-.1 9984.7,5229.6 ; SF9.1 10145.9,6355 10734.7,6355 ; S=.1 10573.9,5229.6 9984.7,5229.6 ; SF10.1 10734.7,6355 ; SF11.1 11484.7,6355 ; SF12.1 12073.5,6355 11484.7,6355 ; 10734.7,6355 11484.7,6355
  Bottom Layer w10: STILDE.1 SESC.1 1734.7,6678.7 1926.1,6870.1 1985.9,6870.1 PCB1.37 ; S2.1 SF1.1 ; SF2.1 3984.7,5818.8 S4.1 ; S5.1 SF4.1 ; S6.1 S7.1 ; SF7.1 8505.8,6193.8 ; S9.1 S9.1@8505.8,5089.9 ; SF8.1 8505.8,6193.8 ; S0.1 8526.9,5068.8 S9.1@8505.8,5089.9 ; S-.1 SF9.1 ; SBACKSPACE.1 12102,5068.8 12189.8,5156.6 ; SF12.1 12234.7,5201.5 12189.8,5156.6 ; CN1.35 CN1.37 13045.9,4365.1 12981.2,4365.1 12189.8,5156.6 ; S9.1@8505.8,5089.9 8505.8,6193.8
ROW2: CN1.33 PCB1.33 S[.1 S\.1 S].1 SE.1 SI.1 SO.1 SP.1 SQ.1 SR.1 ST.1 STAB.1 SU.1 SW.1 SY.1 | length 14938
  Top Layer w10: STAB.1 v1(2567.4,3568.8) ; SQ.1 SW.1 SE.1 SR.1 ST.1 SY.1 SU.1 SI.1 SO.1 SP.1 S[.1 S].1 S\.1
  Bottom Layer w10: PCB1.33 2284.5,6968.7 2649.6,6968.7 2685.9,6932.4 2685.9,6905.7 2724,6867.6 2753,6867.6 2785.9,6834.7 2785.9,5233.6 2797.7,5221.8 2797.7,5005.3 2789.9,4997.5 2789.9,4388.6 SQ.1@2852,4326.5 ; v1(2567.4,3568.8) 2567.4,4041.8 SQ.1@2852,4326.5 ; SQ.1 SQ.1@2852,4326.5 ; S\.1 12773.8,4318.8 12927.5,4165.1 13045.9,4165.1 CN1.33
ROW3: CN1.31 PCB1.31 S'.1 S;.1 SA.1 SCAPS.1 SD.1 SENTER.1 SF.1 SG.1 SH.1 SJ.1 SK.1 SL.1 SS.1 | length 14645.7
  Top Layer w10: v1(2362.1,4110.1) v1(2764.8,4110.1) ; SA.1 SS.1 SD.1 SF.1 SG.1 SH.1 SJ.1 SK.1 SL.1 9799.7,3568.8 S'.1 SENTER.1 11769.7,3610 12123.8,3964.1 12123.8,3969.7 12137.3,3983.2 12142.9,3983.2 12218.3,4058.6 13052.4,4058.6 CN1.31
  Bottom Layer w10: SCAPS.1 2142.7,4536.8 ; PCB1.31 2286.6,6870.7 2286.6,4680.7 2142.7,4536.8 ; v1(2362.1,4110.1) 2362.1,4317.3 2142.7,4536.8 ; v1(2764.8,4110.1) 2764.8,3853.7 SA.1
ROW4: CN1.29 PCB1.29 S,.1 S..1 S/.1 SB.1 SC.1 SLSHIFT.1 SM.1 SN.1 SRSHIFT.1 SV.1 SX.1 SZ.1 | length 16461.4
  Top Layer w10: SLSHIFT.1 SZ.1 3587.8,2981.9 4011.6,2981.9 SX.1 ; SC.1 5086.3,2980.4 5513.1,2980.4 SV.1 ; SB.1 SN.1 7336.6,2980.7 7762.8,2980.7 SM.1 ; 8674.7,2818.8 S..1 9430.2,2824.4 10169.1,2824.4 S/.1 10180.2,2824.4 11574.1,2824.4 SRSHIFT.1
  Bottom Layer w10: SLSHIFT.1 2204.7,3377.3 2385.2,3557.8 2385.2,6869.4 PCB1.29 ; SX.1 4174.7,2706.6 4347.5,2533.8 4546.1,2533.8 4831.1,2818.8 SC.1 ; SV.1 SB.1 ; SM.1 7924.7,2742.2 8041.3,2625.7 8109.7,2625.7 8302.9,2818.8 8674.7,2818.8 ; SRSHIFT.1 12626,3865.1 13045.9,3865.1 CN1.29
ROW5: CN1.27 PCB1.27 SFN.1 SLALT.1 SLCTRL.1 SLWIN.1 SRALT.1 SRCTRL.1 SRWIN.1 SSPACE.1 | length 18152.5
  Top Layer w10: SLCTRL.1 SLWIN.1 SLALT.1 5301.2,2068.8 5776.1,2543.7 5879.1,2543.7 5882,2540.8 5882,2485.1 6302,2065.1 SSPACE.1 6677,2226.2 9172.3,2226.2 SRALT.1
  Bottom Layer w10: PCB1.27 2580.8,6875.2 2580.8,5051.9 2544.3,5015.4 2544.3,3021 2769.7,2795.6 SLWIN.1 ; SRALT.1 SRWIN.1 10430.3,2229.4 11046.6,2229.4 SFN.1 SRCTRL.1 12140.9,2853.1 12952.9,3665.1 13004.6,3665.1 13037,3697.5 13037,3756.2 CN1.27
SESC_2: DESC.2 SESC.2 | length 359.2
  Top Layer w10: DESC.2 1983.4,5973.7 1984.7,5975 SESC.2
SF1_2: DF1.2 SF1.2 | length 419.2
  Top Layer w10: DF1.2 3483.4,6292.5 SF1.2
SF2_2: DF2.2 SF2.2 | length 421.3
  Top Layer w10: DF2.2 v1(4228.4,5921.1)
  Bottom Layer w10: v1(4228.4,5921.1) 4234.7,5927.4 SF2.2
SF3_2: DF3.2 SF3.2 | length 419.2
  Top Layer w10: DF3.2 4983.4,5913.7 4984.7,5915 SF3.2
SF4_2: DF4.2 SF4.2 | length 419.2
  Top Layer w10: DF4.2 5733.4,5913.7 5734.7,5915 SF4.2
SF5_2: DF5.2 SF5.2 | length 541.7
  Top Layer w10: v1(6826.4,5836.5) 6858.4,5836.5 DF5.2
  Bottom Layer w10: v1(6826.4,5836.5) 6859.7,5869.8 SF5.2
SF6_2: DF6.2 SF6.2 | length 470.6
  Top Layer w10: DF6.2 v1(7645.5,5875.1)
  Bottom Layer w10: SF6.2 7609.7,5910.9 v1(7645.5,5875.1)
SF7_2: DF7.2 SF7.2 | length 420.2
  Top Layer w10: SF7.2 8363.4,6290.1 DF7.2
SF8_2: DF8.2 SF8.2 | length 419.2
  Top Layer w10: DF8.2 9108.4,5913.7 9109.7,5915 SF8.2
SF9_2: DF9.2 SF9.2 | length 420.2
  Top Layer w10: SF9.2 10238.4,6290.1 DF9.2
SF10_2: DF10.2 SF10.2 | length 419.2
  Top Layer w10: DF10.2 10983.4,5913.7 10984.7,5915 SF10.2
SF11_2: DF11.2 SF11.2 | length 420.2
  Top Layer w10: SF11.2 11738.4,6290.1 DF11.2
SF12_2: DF12.2 SF12.2 | length 414.2
  Top Layer w10: DF12.2 12483.4,5918.7 12484.7,5920 SF12.2
pads on no net: S0. S1. S2. S3. S4. S5. S6. S7. S8. S9. S'. S,. S-. S.. S/. S;. S=. S[. S\. S]. SA. SB. SBACKSPACE. SC. SCAPS. SD. SE. SENTER. SESC. SF1. SF2. SF3. SF4. SF5. SF6. SF7. SF8. SF9. SF10. SF11. SF12. SF. SFN. SG. SH. SI. SJ. SK. SL. SLALT. SLCTRL. SLSHIFT. SLWIN. SM. SN. SO. SP. SQ. SR. SRALT. SRCTRL. SRSHIFT. SRWIN. SS. SSPACE. ST. STAB. STILDE. SU. SV. SW. SX. SY. SZ.

## Other copper
Top Layer:
  text "Raspberry Pi Zero Keyboard / Design By Spaceless" at 7270,1910 h80

## Silkscreen, mask and mechanical layers (free items; w line width, h text height)
Document:
  lines w0.1: 7429,4720.3 7431,4722.3